# Altium PCB SHield2Gen.PcbDoc
Units mil, origin at the board's own origin, x right, y up, seen from the top; angles counter-clockwise.
Board outline 3610 x 2445 mil, 2 copper layers (Top Layer, Bottom Layer); 59 components, 131 nets, 342 pads, 22 vias.
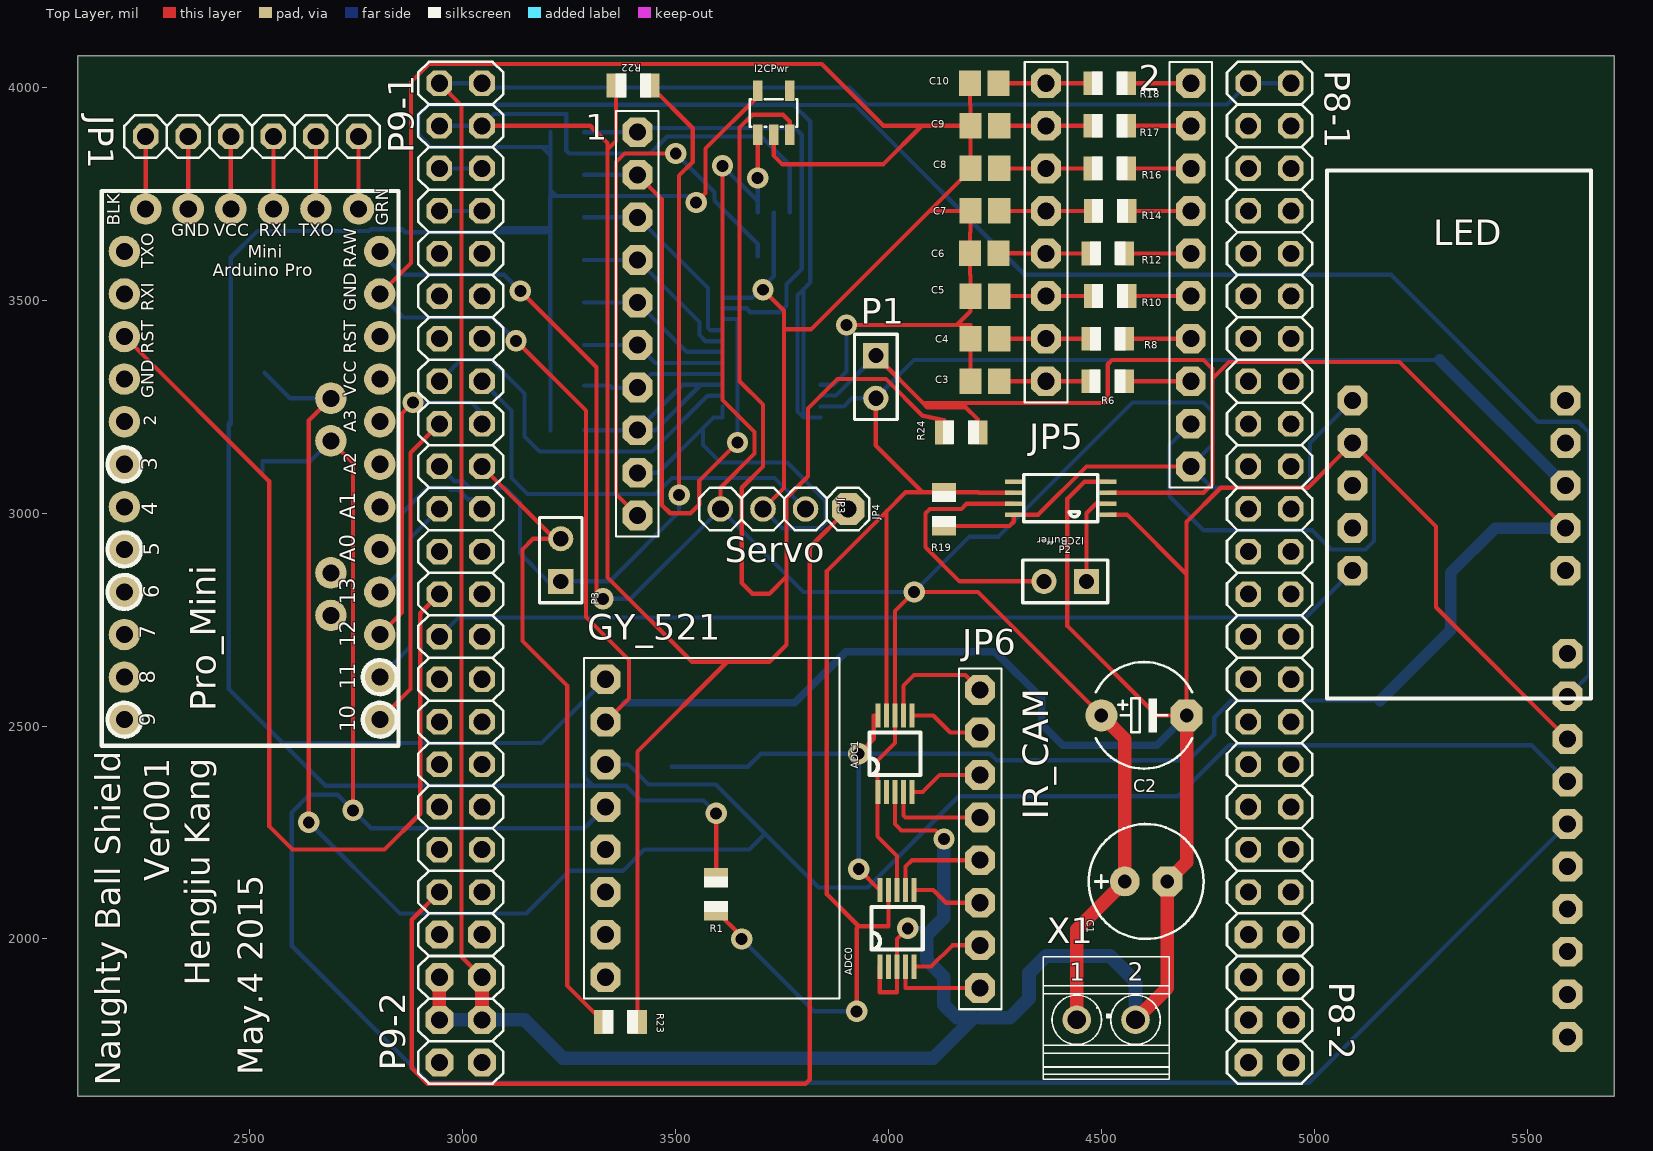
[diagram p0: Top Layer view]
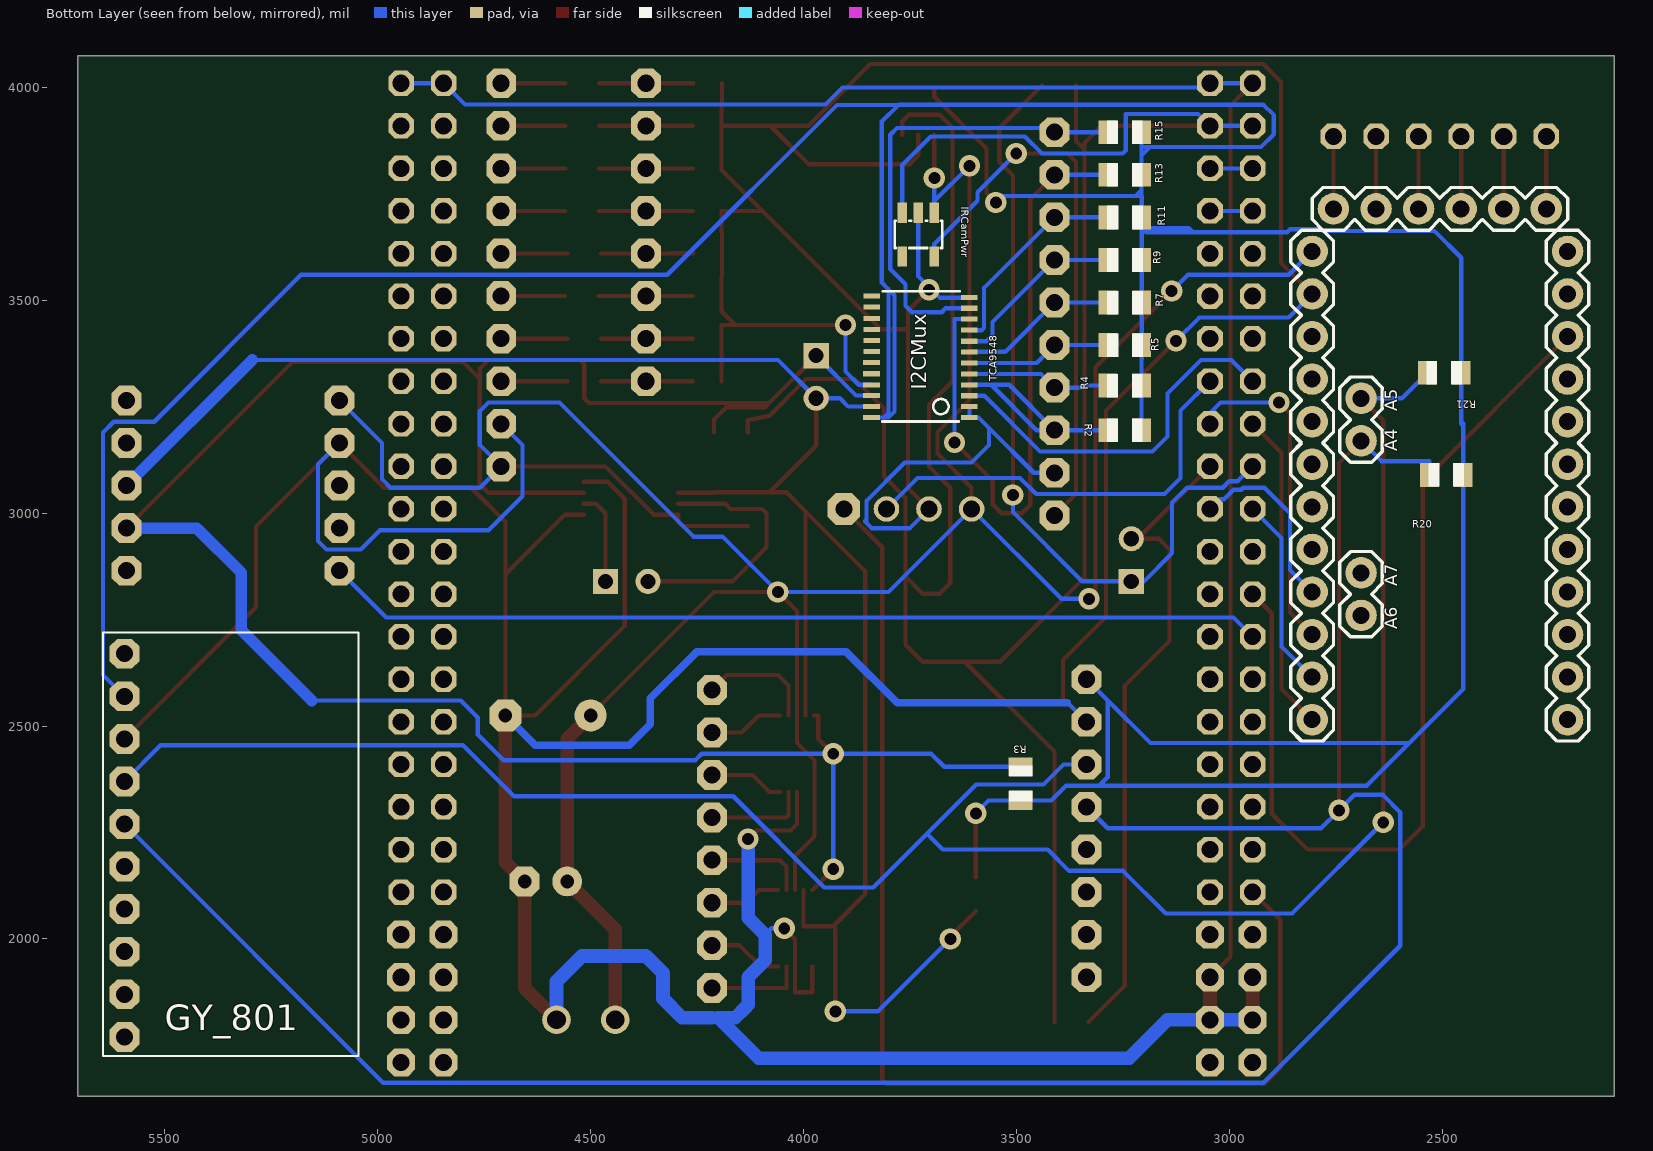
[diagram p1: Bottom Layer view, seen from below]

## Layer stack, top to bottom
Top Solder: solder mask 0.4, Solder Resist, Dk 3.5
Top Layer: signal copper 1.4
Dielectric 1: dielectric 12.6, FR-4, Dk 4.8
Bottom Layer: signal copper 1.4
Bottom Solder: solder mask 0.4, Solder Resist, Dk 3.5

## Board outline
2095,1630 5705,1630 5705,4075 2095,4075

## Design rules (kind name [scope] priority, off if disabled: settings)
Clearance [All] p1: gap=10
PolygonConnect [All] p1: connectstyle=Relief reliefconductorwidth=10 reliefentries=4 polygonreliefangle="90 Angle" airgapwidth=10
RoutingVias [All] p1: holewidth=28 width=50 viastyle="Through Hole" minholewidth=28 minwidth=50 maxholewidth=28 maxwidth=50
SolderMaskExpansion [All] p1: expansion=4
UnpouredPolygon [All] p1: allowunpoured=FALSE
Width [All] p1: maxlimit=32 minlimit=10 preferedwidth=10 minimp=50.000000 maximp=50.000000 favimp=50.000000
29 further rules are at their usual default settings.

## Classes and differential pairs
component class IRReceiver: 2 ADC0 ADC1 C3 C4 C5 C6 C7 C8 C9 C10 JP5 JP6 R6 R8 R10 R12 R14 R16 R17 R18
component class I2Cmux: 1 I2CMux IRCamPwr R1 R2 R3 R4 R5 R7 R9 R11 R13 R15
component class IMU_Core: GY_521 GY_801 JP1 Pro_Mini R20 R21
component class LED_Band: LED
component class main_pinout: C1 C2 I2CBuffer I2CPwr JP3 JP4 P1 P2 P3 P8-1 P8-2 P9-1 P9-2 R19 R22 R23 R24 X1

## Components (designator, comment, footprint, x,y, rotation, side; value= is the part's Value field where it differs from the comment)
1 "IR_Camera" 1X10-BIG 3410,3445 r90 top
2 "App_Sensor" 1X10-BIG 4710,3560 r90 top
ADC0 "ADS1115" 10-VSSOP 4080,1935 r90 top
ADC1 "ADS1115" 10-VSSOP 4075,2345 r90 top
C1 "47uF" E2,5-7 4605,2135 r0 top
C2 "0.47uF" E5-6 4600,2525 r0 top
C3 "100u" C0805 4226.54,3310 r180 top
C4 "100u" C0805 4226.54,3410 r180 top
C5 "100u" C0805 4226.54,3510 r180 top
C6 "100u" C0805 4225,3610.71 r180 top
C7 "100u" C0805 4226.54,3710 r180 top
C8 "100u" C0805 4226.54,3810 r180 top
C9 "100u" C0805 4226.54,3910 r180 top
C10 "100u" C0805 4225,4010 r180 top
GY_521 "GY_521" sensor_8pin 3335,1860 r0 top locked
GY_801 "GY-801" Sensor_10Pin 5595,1770 r180 bottom
I2CBuffer "LTC4301" TSSOP-8 4405,3035 r90 top
I2CMux "TCA9548" TSSOP24 3725,3340 r90 bottom
I2CPwr "LP5907" SOT23-5L 3730,3940 r0 top
IRCamPwr "LP5907" SOT23-5L 3730,3655 r0 bottom
JP1 "<b>PIN HEADER</b>" 1X06 2505,3885 r0 top
JP3 "Servo_Ctl" 1X03 3705,3010 r0 top
JP4 "Servo_FB" 1X01 3905,3010 r0 top
JP5 "<b>PIN HEADER</b>" 1X08-BIG 4370,3660 r90 top
JP6 "<b>PIN HEADER</b>" 1X08-BIG 4215,2235 r90 top
LED "Trinket8M" trinket 5030,2565 r0 top
P1 "Header 2" HDR1X2 3970,3370 r270 top
P2 "Header 2" HDR1X2 4465,2840 r180 top
P3 "Header 2" HDR1X2 3230,2840 r90 top
P8-1 "2x20" 2X20 4895,3060 r270 top locked
P8-2 "2x4" 2X04 4895,1860 r270 top locked
P9-1 "2x20" 2X20 2995,3060 r270 top locked
P9-2 "2x4" 2X04 2995,1860 r270 top locked
Pro_Mini "Arduino_Pro_Mini" Arduino_pro_mini 2152,2454 r0 top locked
R1 "4.7K" R0805 3595,2105 r90 top
R2 "4.7K" R0805 3245,3195 r0 bottom
R3 "4.7K" R0805 3490,2365 r270 bottom
R4 "4.7K" R0805 3245,3300 r0 bottom
R5 "4.7K" R0805 3244.37,3395 r0 bottom
R6 "10k" R0805 4514.37,3310 r0 top
R7 "4.7K" R0805 3244.37,3495 r0 bottom
R8 "10k" R0805 4515,3410 r0 top
R9 "4.7K" R0805 3244.37,3595 r0 bottom
R10 "10k" R0805 4520,3510 r0 top
R11 "4.7K" R0805 3244.37,3695 r0 bottom
R12 "10k" R0805 4515,3610 r0 top
R13 "4.7K" R0805 3245,3795 r0 bottom
R14 "10k" R0805 4520,3710 r0 top
R15 "4.7K" R0805 3245,3895 r0 bottom
R16 "10k" R0805 4519.37,3810 r0 top
R17 "10k" R0805 4519.37,3910 r0 top
R18 "10k" R0805 4519.37,4010 r0 top
R19 "10K" R0805 4130,3010 r270 top
R20 "4.7K" R0805 2490,3090 r180 bottom
R21 "4.7K" R0805 2495,3330 r180 bottom
R22 "4.7K" R0805 3400,4005 r180 top
R23 "4.7K" R0805 3370,1805 r0 top
R24 "10K" R0805 4170,3190 r0 top
X1 "MKDS 1/ 2-3,5" 1751248 4511,1813.94 r0 top

## Footprints (in the part's own frame and the unit in brackets; to place one, negate y for a bottom-side part, rotate by r counter-clockwise, add the part's x,y. Pads: shape width x height; smd on the part's side, far side on the other; paste and mask are expansions set on the pad)
1X01 [mil]
  oct 76x76 hole 40: 1(0,0)
  silkscreen extent -50,-50 50,50
1X03 [mil]
  round 60 hole 40: 1(-100,0) 2(0,0) 3(100,0)
  silkscreen extent -150,-50 150,50
1X06 [mil]
  oct 60x60 hole 40: 1(-250,0) 2(-150,0) 3(-50,0) 4(50,0) 5(150,0) 6(250,0)
  silkscreen extent -300,-50 300,50
1X08-BIG [mil]
  oct 70x70 hole 40: 1(-350,0) 2(-250,0) 3(-150,0) 4(-50,0) 5(50,0) 6(150,0) 7(250,0) 8(350,0)
  silkscreen extent -400,-50 400,50
1X10-BIG [mil]
  oct 70x70 hole 40: 1(-450,0) 2(-350,0) 3(-250,0) 4(-150,0) 5(-50,0) 6(50,0) 7(150,0) 8(250,0) 9(350,0) 10(450,0)
  silkscreen extent -500,-50 500,50
2X04 [mil]
  oct 66x66 hole 40: 1(-150,-50) 2(-150,50) 3(-50,-50) 4(-50,50) 5(50,-50) 6(50,50) 7(150,-50) 8(150,50)
  silkscreen extent -200,-100 200,100
2X20 [mil]
  oct 60x60 hole 40: 1(-950,-50) 2(-950,50) 3(-850,-50) 4(-850,50) 5(-750,-50) 6(-750,50) 7(-650,-50) 8(-650,50) 9(-550,-50) 10(-550,50) 11(-450,-50) 12(-450,50) 13(-350,-50) 14(-350,50) 15(-250,-50) 16(-250,50) 17(-150,-50) 18(-150,50) 19(-50,-50) 20(-50,50) 21(50,-50) 22(50,50) 23(150,-50) 24(150,50) 25(250,-50) 26(250,50) 27(350,-50) 28(350,50) 29(450,-50) 30(450,50) 31(550,-50) 32(550,50) 33(650,-50) 34(650,50) 35(750,-50) 36(750,50) 37(850,-50) 38(850,50) 39(950,-50) 40(950,50)
  silkscreen extent -1000,-100 1000,100
10-VSSOP [mil]
  rect 57x12 smd mask+0: 1(0,100) 2(0,80) 3(0,60) 4(0,40) 5(0,20) 6(180,20) 7(180,40) 8(180,60) 9(180,80) 10(180,100)
  silkscreen extent 40,0 140,120
1751248 [mil]
  round 67 hole 44: 1(-68.9,-3.94) 2(69,-3.94)
  silkscreen extent -148,-144 148,144
Arduino_pro_mini [mil]
  round 74 hole 40: 1(53,1161) 2(53,1061) 3(53,961) 4(53,861) 5(53,761) 6(53,661) 7(53,561) 8(53,461) 9(53,361) 10(53,261) 11(53,161) 12(53,61) 13(653,61) 14(653,161) 15(653,261) 16(653,361) 17(653,461) 18(653,561) 19(653,661) 20(653,761) 21(653,861) 22(653,961) 23(653,1061) 24(653,1161) 25(603,1261) 26(503,1261) 27(403,1261) 28(303,1261) 29(203,1261) 30(103,1261) 31(538,306) 32(538,406) 33(538,716) 34(538,816)
  silkscreen extent 0,0 697,1303
C0805 [mil]
  rect 52x60 smd: 1(-33.46,0) 2(34,0)
E2,5-7 [mil]
  round 70 hole 32: +(-50,0)
  oct 70x70 hole 32: -(50,0)
  silkscreen extent -135,-135 135,135
E5-6 [mil]
  round 75 hole 32: +(-100,0)
  oct 75x75 hole 32: -(100,0)
  silkscreen extent -113,-125 113,126
HDR1X2 [mm] "Connector; Header; 2 Position"
  rect 1.5x1.5 hole 0.9: 1(0,0)
  round 1.5 hole 0.9: 2(2.54,0)
  silkscreen extent -1.27,-1.27 3.81,1.27
R0805 [mil]
  rect 44x56 smd: 1(-39.37,0) 2(40,0)
  silkscreen extent -42,-28 42,28
sensor_8pin [mil]
  oct 70x70 hole 40: 1(0,750) 2(0,650) 3(0,550) 4(0,450) 5(0,350) 6(0,250) 7(0,150) 8(0,50)
  silkscreen extent -50,0 550,800
Sensor_10Pin [mil]
  oct 70x70 hole 40: 1(0,900) 2(0,800) 3(0,700) 4(0,600) 5(0,500) 6(0,400) 7(0,300) 8(0,200) 9(0,100) 10(0,0)
  silkscreen extent -50,-45 550,950
SOT23-5L [mil]
  rect 22x48 smd: 1(-37.4,-51.18) 2(0,-51.18) 3(38,-51.18) 4(38,52) 5(-37.4,52)
  silkscreen extent -56,-32 56,32
trinket [mil]
  oct 70x70 hole 40: 1(60,700) 2(60,600) 3(60,500) 4(60,400) 5(60,300) 6(560,300) 7(560,400) 8(560,500) 9(560,600) 10(560,700)
  silkscreen extent 0,0 620,1240
TSSOP24 [mil]
  rect 12x39 smd: 1(-115.16,-114.87) 2(-89.57,-114.87) 3(-63.98,-114.87) 4(-38.39,-114.87) 5(-12.8,-114.87) 6(13,-114.87) 7(39,-114.87) 8(64,-114.87) 9(90,-114.87) 10(116,-114.87) 11(141.36,-114.87) 12(166.36,-114.87) 13(169.92,114.65) 14(144.09,114.57) 15(117.69,114.87) 16(91.51,114.87) 17(65.51,114.87) 18(39.51,114.87) 19(13.64,115) 20(-12.36,115) 21(-38.36,115) 22(-63.36,115) 23(-89.36,115) 24(-115.16,115)
  silkscreen extent -125,-92 181,90
TSSOP-8 [mil]
  rect 10x40 smd: 1(-38.39,-110.75) 2(-12.8,-110.75) 3(13,-110.75) 4(39,-110.75) 5(39,111) 6(13,111) 7(-12.8,111) 8(-38.39,111)
  silkscreen extent -55,-87 56,87

## Part data
1 2: library part PINHD-1X10
C1: library part CPOL-USE2.5-7
C2: library part CPOL-USE5-6
C3 C4 C5 C6 C7 C8 C9 C10: library part C-USC0805
JP1: library part PINHD-1X6
JP3: library part PINHD-1X3
JP4: library part PINHD-1X1
JP5 JP6: library part PINHD-1X8BIG
P1 P2 P3: "Header, 2-Pin"
P8-1 P9-1: library part PINHD-2X20
P8-2 P9-2: library part PINHD-2X4
R1 R2 R3 R4 R5 R6 R7 R8 R9 R10 R11 R12 R13 R14 R15 R16 R17 R18 R19 R20 R21 R22 R23 R24: library part R-US_R0805
X1: library part 1751248

## Via types
v1: diameter 50, hole 28, Top Layer to Bottom Layer, 22 vias

## Nets (pads, with @x,y where several pads share a name; then routed paths per layer and width w, separated by ;. In a path a pad name is that pad's centre, name@x,y a point inside that pad or via, vN(x,y) a via of type N, cw(c..) or ccw(c..) an arc to the next point about the centre after c; other vN are vias at no path point)
ADC0_0: C3.1 JP5.1 R6.1 | length 215
  Top Layer w10: C3.1 JP5.1 R6.1
ADC0_1: C4.1 JP5.2 R8.1 | length 215.6
  Top Layer w10: C4.1 JP5.2 R8.1
ADC0_2: C5.1 JP5.3 R10.1 | length 220.6
  Top Layer w10: C5.1 JP5.3 R10.1
ADC0_3: C6.1 JP5.4 R12.1 | length 217.5
  Top Layer w10: C6.1 4313,3610.71 4313.71,3610 JP5.4 R12.1
ADC1_0: C7.1 JP5.5 R14.1 | length 220.6
  Top Layer w10: C7.1 JP5.5 R14.1
ADC1_1: C8.1 JP5.6 R16.1 | length 220
  Top Layer w10: C8.1 JP5.6 R16.1
ADC1_2: C9.1 JP5.7 R17.1 | length 220
  Top Layer w10: C9.1 JP5.7 R17.1
ADC1_3: C10.1 JP5.8 R18.1 | length 221.5
  Top Layer w10: C10.1 JP5.8 R18.1
AIN0: JP4.1 P9-1.39 | length 2771.7
  Top Layer w10: P9-1.39 2880,2045 2880,1697 2917,1660 3805,1660 3815,1670 3815,2920 JP4.1
AIN1: P9-1.40
AIN2: P9-1.37
AIN3: P9-1.38
AIN4: P9-1.33
AIN5: P9-1.36
AIN6: P9-1.35
APP0: 2.3 R6.2 | length 155.6
  Top Layer w10: R6.2 2.3
APP1: 2.4 R8.2 | length 155
  Top Layer w10: R8.2 2.4
APP2: 2.5 R10.2 | length 150
  Top Layer w10: R10.2 2.5
APP3: 2.6 R12.2 | length 155
  Top Layer w10: R12.2 2.6
APP4: 2.7 R14.2 | length 150
  Top Layer w10: R14.2 2.7
APP5: 2.8 R16.2 | length 150.6
  Top Layer w10: R16.2 2.8
APP6: 2.9 R17.2 | length 150.6
  Top Layer w10: R17.2 2.9
APP7: 2.10 R18.2 | length 150.6
  Top Layer w10: R18.2 2.10
CAM_3V3: 1.1 IRCamPwr.5 | length 1320.8
  Top Layer w10: 1.1 3360,3045 3360,3825 3380,3845 v1(3500,3845)
  Bottom Layer w10: v1(3500,3845) 3591.06,3753.94 3591.06,3733.94 3692.6,3632.4 IRCamPwr.5
DGND: 1.2 2.2 ADC0.1 ADC0.3 ADC1.3 C1.- C2.- C3.2 C4.2 C5.2 C6.2 C7.2 C8.2 C9.2 C10.2 GY_521.2 GY_801.3 I2CBuffer.1 I2CBuffer.4 I2CMux.1 I2CMux.2 I2CMux.12 I2CMux.21 I2CPwr.2 IRCamPwr.2 JP3.2 LED.2 P8-1.1 P8-1.2 P9-1.1 P9-1.2 P9-2.3 P9-2.4 P9-2.5 P9-2.6 Pro_Mini.23 X1.2 | length 20819.5
  Top Layer w10: Pro_Mini.23 2878,3588 2878,4013 2920,4055 3843,4055 3988,3910 4078,3910 ; P9-1.1 2997,3958 2997,1958 P9-2.4 ; v1(3125,3405) 3289,3241 3289,2756 3390,2655 3390,2565 GY_521.2 ; v1@3695,3521.36 3695,3535 3754.5,3475.5 3754.5,3431.86 ; JP3.2 3754.5,3059.5 3754.5,3431.86 ; I2CPwr.2 3730,3840 3750,3820 3988,3820 4078,3910 ; v1(3901,3442) 4160,3442 ; ADC0.1 3979,1935 3979,1875 4020,1875 ADC0.3 4020,2000 v1(4045,2025) ; ADC1.3 4015,2270 4030,2255 4110,2255 v1(4130,2235) ; C10.2 4191,3960.54 4192.54,3959 C9.2 ; C3.2 C4.2 4192.54,3442 4160,3442 ; I2CBuffer.1 4560,2996.61 4700,2856.61 ; I2CBuffer.4 4460,3074 4420,3034 4420,2735 4630,2525 C2.- 4700,2856.61 ; GY_801.3 5286,2779 5286,2969 LED.2 4985,3060 4780.29,3060 4700,2979.71 4700,2856.61 ; 3754.5,3431.86 3817.86,3431.86 4096,3710 ; 4078,3910 C9.2 ; 4096,3710 4192.54,3806.54 C8.2 C9.2 ; 4096,3710 C7.2 4192.54,3660.54 4191,3659 C6.2 4191,3560.54 4192.54,3559 C5.2 4192.54,3474.54 4160,3442
  Top Layer w32: P9-2.5 P9-2.3 ; P9-2.6 P9-2.4 ; X1.2 4655,1885 C1.- 4700,2180 C2.-
  Bottom Layer w10: Pro_Mini.23 2860,3460 3070,3460 v1(3125,3405) ; P9-1.1 P9-1.2 3055,4000 3908.28,4000 3948.28,3960 4795,3960 P8-1.1 P8-1.2 ; GY_521.2 3380,2555 ; 1.2 3459,3095 3564,3200 ; I2CMux.2 I2CMux.1 3588.84,3224.84 3564,3200 ; I2CMux.12 3680,3506.36 v1@3701.82,3528.18 ; JP3.2 3750,2965 3840,2965 3852,2977 ; v1(3705,3525) 3705,3531.36 3730,3556.36 IRCamPwr.2 ; I2CMux.21 3870,3301.64 3901,3332.64 v1(3901,3442) ; v1(4045,2025) 4075,2025 4090,2010 ; 4130,1845 4135,1840 ; 4200,1815 4215,1815 ; 2.2 4660,3160 4660,3040 4740,2960 4995,2960 5040,2915 5120,2915 5140,2935 5140,3115 LED.2 ; 3564,3200 3564,3160 3605,3119 3762,3119 3852,3029 3852,2984.79 ; 3852,2977 3852,2984.79 ; 3852,2977 3855,2980 3855,2981.79 3852,2984.79
  Bottom Layer w18: 3380,2555 3780,2555 3900,2675 4250,2675 4360,2565 4360,2504 4409,2455 4630,2455 C2.-
  Bottom Layer w32: P9-2.5 P9-2.6 3145,1810 3235,1720 4105,1720 4200,1815 4160,1815 4135,1840 ; 4130,1845 4130,1910 4090,1950 4090,2010 4130,2050 v1(4130,2235) ; 4215,1815 4285,1815 4330,1860 4330,1920 4370,1960 4520,1960 4580,1900 X1.2
EXT.5V: 2.1 ADC0.8 ADC1.1 ADC1.8 C1.+ C2.+ I2CBuffer.8 I2CPwr.1 IRCamPwr.1 JP3.1 LED.1 Pro_Mini.24 R19.2 X1.1 | length 7569.9
  Top Layer w10: v1(3135,3522) 3314,3343 3314,2814 v1(3329,2799) ; JP3.1 3605,3060 3685,3140 3685,3191 3610,3266 v1(3610,3816) ; v1(3692.6,3787.4) I2CPwr.1 ; ADC0.8 4020,2195 3974,2241 3974,2419 4015,2460 ADC1.8 4015,2770 v1(4060,2815) 4210,2815 C2.+ ; R19.2 4284,2970 4294,2980 I2CBuffer.8 4351.61,2996.61 4465,3110 2.1
  Top Layer w32: X1.1 4442.1,2022.1 C1.+ 4555,2470 C2.+
  Bottom Layer w10: Pro_Mini.24 2860,3560 3097,3560 v1(3135,3522) ; v1(3329,2799) 3394,2799 JP3.1 3800,2815 v1(4060,2815) 4190,2945 4258,2945 4573,3260 4740,3260 4760,3240 4760,3160 2.1 4760,3060 4970,3060 4990,3080 4990,3165 LED.1 ; v1(3610,3816) 3692.6,3733.4 ; IRCamPwr.1 3692.6,3733.4 ; v1@3695,3785 v1(3692.6,3787.4) 3692.6,3733.4
GNDA_ADC: P9-1.34
GPIO_2: P9-1.22 Pro_Mini.16 | length 440.1
  Bottom Layer w10: Pro_Mini.16 2857,2867 2857,3000 2917,3060 2966.72,3060 2971.72,3055 2990,3055 3012,3033 3022,3033 P9-1.22
GPIO_3: P9-1.21 Pro_Mini.14 | length 453
  Bottom Layer w10: Pro_Mini.14 2877,2687 2877,2942 P9-1.21
GPIO_4: P9-1.17 Pro_Mini.13 | length 753
  Top Layer w10: Pro_Mini.13 2877,2587 2877,3142 P9-1.17
GPIO_5: P9-1.18 Pro_Mini.15 | length 774.7
  Top Layer w10: Pro_Mini.15 2857,2767 2857,3234 v1(2883,3260)
  Bottom Layer w10: v1(2883,3260) 3020,3260 3045,3235 P9-1.18
GPIO_7: P9-2.2
GPIO_8: P8-1.35
GPIO_9: P8-1.33
GPIO_10: P8-1.31
GPIO_11: P8-1.32
GPIO_14: P9-1.26
GPIO_15: P9-1.24
GPIO_20: P9-2.1
GPIO_22: P8-1.19
GPIO_23: P8-1.13
GPIO_26: P8-1.14
GPIO_27: P8-1.17
GPIO_30: P9-1.11
GPIO_31: P9-1.13
GPIO_32: P8-1.25
GPIO_33: P8-1.24
GPIO_34: P8-1.5
GPIO_35: P8-1.6
GPIO_36: P8-1.23
GPIO_37: P8-1.22
GPIO_38: P8-1.3
GPIO_39: P8-1.4
GPIO_40: P9-1.14
GPIO_44: P8-1.12
GPIO_45: P8-1.11
GPIO_46: P8-1.16
GPIO_47: P8-1.15
GPIO_48: I2CMux.3 P9-1.15 | length 888.3
  Bottom Layer w10: P9-1.15 2995,3360 3066,3360 3145,3281 3145,3180 3180,3145 3443.98,3145 3575,3276.02 I2CMux.3
GPIO_49: P9-1.23
GPIO_51: JP3.3 P9-1.16 | length 1008.3
  Bottom Layer w10: P9-1.16 3114,3241 3114,3083 3152,3045 3453,3045 3491,3083 3732,3083 JP3.3
GPIO_60: P9-1.12
GPIO_61: P8-1.26
GPIO_62: P8-1.21
GPIO_63: P8-1.20
GPIO_65: P8-1.18
GPIO_66: P8-1.7
GPIO_67: P8-1.8
GPIO_68: P8-1.10
GPIO_69: P8-1.9
GPIO_71: P8-2.6
GPIO_73: P8-2.4
GPIO_75: P8-2.2
GPIO_76: P8-1.39
GPIO_77: P8-1.40
GPIO_78: P8-1.37
GPIO_79: P8-1.38
GPIO_80: P8-1.36
GPIO_81: P8-1.34
GPIO_86: P8-1.27
GPIO_87: P8-1.29
GPIO_88: P8-1.28
GPIO_89: P8-1.30
GPIO_117: P9-1.25 Pro_Mini.3 | length 2238
  Top Layer w10: Pro_Mini.3 2545,3075 2545,2265 2600,2210 2816,2210 2900,2294 2900,2765 P9-1.25
GPIO_120: P9-1.31
GPIO_121: P9-1.29
GPIO_122: P9-1.30
GPIO_123: P9-1.28
GPIO_125: LED.5 P9-1.27 | length 2209.2
  Bottom Layer w10: P9-1.27 2990,2755 4980,2755 LED.5
I2C2_SCL: P3.1 P9-1.19 R22.1 | length 1869
  Top Layer w10: R22.1 3540,3904.37 3540,3825 3508,3793 v1(3508,3043)
  Bottom Layer w10: P9-1.19 2980,3075 3000,3075 3015,3060 3099,3060 3134,3025 3134,2906 3200,2840 3345,2840 3508,3003 v1(3508,3043)
I2C2_SDA: P3.2 P9-1.20 R23.1 | length 1529.7
  Top Layer w10: P9-1.20 P3.2@3215,2940 ; P3.2 3165,2940 3140,2915 3140,2700 3245,2595 3245,1890.63 R23.1
NC: LED.10
NEOPIN: LED.4
Net1_3: 1.3 I2CMux.4 R2.2 | length 562.4
  Bottom Layer w10: R2.2 1.3 ; I2CMux.4 3559,3301.61 ; 1.3 3516.61,3301.61 3559,3301.61 ; 1.3 3452.39,3195 3559,3301.61
Net1_4: 1.4 I2CMux.5 R4.2 | length 340.5
  Bottom Layer w10: R4.2 3345,3300 3350,3295 1.4 3442.2,3327.2 I2CMux.5
Net1_5: 1.5 I2CMux.6 R5.2 | length 343.2
  Bottom Layer w10: R5.2 1.5 3452,3353 I2CMux.6
Net1_6: 1.6 I2CMux.7 R7.2 | length 373.8
  Bottom Layer w10: R7.2 1.6 3526,3379 I2CMux.7
Net1_7: 1.7 I2CMux.8 R9.2 | length 423
  Bottom Layer w10: R9.2 1.7 3555.63,3449.37 3555.63,3418.37 3570,3404 I2CMux.8
Net1_8: 1.8 I2CMux.9 R11.2 | length 490.6
  Bottom Layer w10: R11.2 1.8 3575.63,3529.37 3575.63,3435.37 3581,3430 I2CMux.9
Net1_9: 1.9 I2CMux.10 R13.2 | length 1536.3
  Top Layer w10: 1.9 3467,3738 3467,3020 3487,3000 3535,3000 3555,3020 3555,3076 v1(3645,3166)
  Bottom Layer w10: R13.2 1.9 ; I2CMux.10 3645,3456 v1(3645,3166)
Net1_10: 1.10 I2CMux.11 R15.2 | length 1104.2
  Bottom Layer w10: R15.2 1.10 3440,3895 3440,3905 3780.16,3905 3796,3889.16 3796,3573.67 3760,3537.67 3760,3487.36 3744.83,3472.19 3675.17,3472.19 3666,3481.36 I2CMux.11
NetADC0_4: ADC0.4 JP6.1 | length 255
  Top Layer w10: ADC0.4 4040,1885 JP6.1
  Bottom Layer w10: JP6.1 JP6.1@4245,1885
NetADC0_5: ADC0.5 JP6.2 | length 175.7
  Top Layer w10: ADC0.5 4100,1935 4150,1985 JP6.2
NetADC0_6: ADC0.6 JP6.3 | length 167.4
  Top Layer w10: ADC0.6 4105,2115 4135,2085 JP6.3
NetADC0_7: ADC0.7 JP6.4 | length 236.2
  Top Layer w10: ADC0.7 4040,2170 4055,2185 JP6.4
NetADC0_9: ADC0.9 ADC1.9 I2CBuffer.6 I2CMux.23 LED.8 P1.2 R1.1 R19.1 | length 4832.7
  Top Layer w10: R1.1 3655,2005.63 v1(3655,2000) ; v1(3925,1830) 3925,2025 3930,2030 ; P1.2 3970,3159.37 4080,3049.37 ; ADC1.9 3995,3004.37 ; ADC0.9 4000,2030 3930,2030 ; I2CBuffer.6 4212,3048 4210.63,3049.37 R19.1 4080,3049.37 ; 3930,2030 3855,2105 3855,2864.37 3995,3004.37 ; 3995,3004.37 4040,3049.37 4080,3049.37
  Bottom Layer w10: v1(3655,2000) 3825,1830 v1(3925,1830) ; I2CMux.23 3895,3250.64 3914.36,3270 P1.2 4060,3360 5295,3360
  Bottom Layer w27: 5295,3360 LED.8
NetADC0_10: ADC0.10 ADC1.10 I2CBuffer.3 I2CMux.22 LED.7 P1.1 R3.1 R24.2 | length 5712.4
  Top Layer w10: v1(3930,2164) 3979,2115 ADC0.10 ; v1(3930,2435) 3965,2470 3965,2525 ADC1.10 ; P1.1 4081,3259 ; R24.2 4210,3220 4181,3249 4091,3249 4081,3259 ; I2CBuffer.3 4740,3048 4760,3068 4760,3315 ; LED.7 5200,3355 4800,3355 4760,3315 ; 4081,3259 4504,3259 4515,3270 4515,3350 4525,3360 4740,3360 4760,3340 4760,3315
  Bottom Layer w10: R3.1 3669.37,2404.37 3700,2435 v1(3930,2435) ; I2CMux.22 3876.64,3276.64 P1.1 ; v1(3930,2164) v1(3930,2435) ; 5155,2560 4805,2560 4765,2520 4765,2480 4705,2420 4253.71,2420 4238.71,2435 v1(3930,2435)
  Bottom Layer w27: 5155,2560 5320,2725 5320,2860 5425,2965 LED.7
NetADC1_4: ADC1.4 JP6.5 | length 237.1
  Top Layer w10: ADC1.4 4035,2290 4040,2285 JP6.5
NetADC1_5: ADC1.5 JP6.6 | length 176.6
  Top Layer w10: ADC1.5 4080,2345 4120,2385 JP6.6
NetADC1_6: ADC1.6 JP6.7 | length 176.6
  Top Layer w10: ADC1.6 4105,2525 4145,2485 JP6.7
NetADC1_7: ADC1.7 JP6.8 | length 274.9
  Top Layer w10: ADC1.7 4035,2595 4060,2620 4180,2620 JP6.8
NetGY_521_3: GY_521.3 GY_801.4 Pro_Mini.34 R21.1 | length 4989.3
  Top Layer w10: v1(2638,2274) 2638,3218 Pro_Mini.34
  Bottom Layer w10: R21.1 2594.37,3270 Pro_Mini.34 ; v1(2638,2274) 2852,2060 2872,2060 3149,2060 3249,2160 3376,2160 3426,2210 3640,2210 3672.75,2210 3709.88,2247.12 ; GY_521.3 3389,2410 3436,2363 3594,2363 3640,2317 3709.88,2247.12 ; GY_801.4 5510,2455 4800,2455 4680,2335 4165,2335 3951,2121 3836,2121 3709.88,2247.12
NetGY_521_4: GY_521.4 GY_801.5 Pro_Mini.33 R20.1 | length 5605.3
  Top Layer w10: Pro_Mini.33 2742,3118 v1(2742,2302)
  Bottom Layer w10: R20.1 2529.37,3122.37 2642.37,3122.37 Pro_Mini.33 ; GY_521.4 3285,2260 2784,2260 v1(2742,2302) 2705,2339 2640,2339 2598,2297 2598,1984 2920,1662 4987,1662 GY_801.5
NetI2CBuffer_2: I2CBuffer.2 P2.1 | length 219.9
  Top Layer w10: P2.1 4465,3000 4487.2,3022.2 I2CBuffer.2
NetI2CBuffer_7: I2CBuffer.7 P2.2 | length 607.3
  Top Layer w10: I2CBuffer.7 4183.2,3022.2 4171,3010 4097,3010 4087,3000 4087,2920 4167,2840 P2.2
NetJP1_1: JP1.1 Pro_Mini.30 | length 170
  Top Layer w10: Pro_Mini.30 JP1.1
NetJP1_2: JP1.2 Pro_Mini.29 | length 170
  Top Layer w10: Pro_Mini.29 JP1.2
NetJP1_3: JP1.3 Pro_Mini.28 | length 170
  Top Layer w10: Pro_Mini.28 JP1.3
NetJP1_4: JP1.4 Pro_Mini.27 | length 170
  Top Layer w10: Pro_Mini.27 JP1.4
NetJP1_5: JP1.5 Pro_Mini.26 | length 170
  Top Layer w10: Pro_Mini.26 JP1.5
NetJP1_6: JP1.6 Pro_Mini.25 | length 170
  Top Layer w10: Pro_Mini.25 JP1.6
NETLABEL93: P8-2.1
NETLABEL94: P8-2.3
NETLABEL95: P8-2.5
PWR_BUT: P9-1.9
SYS_5V: P9-1.7 P9-1.8 | length 100
  Bottom Layer w10: P9-1.7 P9-1.8
SYS_RST: P9-1.10
VCC_3V3: GY_521.1 GY_801.2 I2CMux.24 I2CPwr.5 R1.2 R2.1 R3.2 R4.1 R5.1 R7.1 R9.1 R11.1 R13.1 R15.1 R20.2 R21.2 | length 11861.1
  Top Layer w10: v1(3548,3730) 3570,3752 3570,3856.4 3692.6,3979 I2CPwr.5 ; R1.2 v1(3595,2295)
  Bottom Layer w10: R2.1 R4.1 3205.63,3363 3205,3363.63 R5.1 R7.1 R9.1 R11.1@3205,3670 ; R15.1 3205.63,3865 3205.63,3860 ; GY_521.1 3285,2560 ; v1(3548,3730) 3533,3745 3220,3745 ; v1(3595,2295) 3565,2325 R3.2 3418,2325 3383,2360 3305,2360 ; I2CMux.24 3810,3224.84 ; GY_801.2 5645,2620 5645,3190 5620,3215 5525,3215 5180,3560 4320,3560 3921,3959 3777,3959 ; 2450,3205 2450,3210 2455,3215 ; 2450,3205 R20.2 2450,2587 2577,2460 ; 2450,3205 2455,3210 2455,3215 ; 2455,3215 R21.2 2455,3600 2518,3663 2780,3663 2784,3667 2857,3667 2864,3660 3085,3660 ; 2577,2460 2677,2360 3305,2360 ; 2577,2460 3185,2460 3285,2560 ; 2919,3959 3777,3959 ; 2919,3959 2920,3960 3776,3960 3777,3959 ; 2919,3959 2895,3935 2895,3890 2925,3860 3185.63,3860 ; 3085,3660 3195,3660 R11.1@3205,3670 ; 3085,3660 3095,3670 R11.1@3205,3670 ; 3185.63,3860 3205.63,3860 ; 3185.63,3860 3205.63,3840 ; R11.1@3205,3670 R11.1 3205,3744 ; 3205,3744 3205,3744.37 3205.63,3745 ; 3205,3744 3205.63,3744.63 3205.63,3745 ; 3205.63,3745 3220,3745 ; 3205.63,3745 3205.63,3759.37 ; 3205.63,3759.37 R13.1 3205.63,3840 ; 3205.63,3759.37 3220,3745 ; 3205.63,3840 3205.63,3860 ; 3285,2560 3285,2380 3305,2360 ; 3777,3959 3816,3920 3816,3541.85 3800,3525.85 ; 3800,3525.85 3786,3511.85 3786,3238.84 3800,3224.84 3810,3224.84 ; 3800,3525.85 3800,3234.84 3810,3224.84
VDD_3V3: I2CPwr.3 IRCamPwr.3 P9-1.3 P9-1.4 R22.2 R23.2 R24.1 | length 6426.2
  Top Layer w10: P9-1.4 3299.37,3910 3340,3869.37 3340,3854 ; R22.2 3360,3874 3340,3854 ; R23.2 3410,2440 3621,2651 ; I2CPwr.3 3768,3920 3752,3936 3680,3936 3650,3906 3650,3310 3705,3255 3705,3110 3655,3060 3655,2836 3680,2811 3720,2811 3760,2851 ; R24.1 4130.63,3218.37 4080,3229 3994,3315 3880,3315 3811,3246 3811,3087 3760,3036 3760,2851 ; 3340,3854 3340,2849 3538,2651 3621,2651 ; 3621,2651 3720,2651 3760,2691 3760,2851
  Bottom Layer w10: P9-1.3 P9-1.4 3073,3938 3243,3938 3243,3852 3250,3845 3440,3845 3480,3885 3701,3885 3768,3818 IRCamPwr.3
VDD_5V: P9-1.5 P9-1.6 | length 100
  Bottom Layer w10: P9-1.5 P9-1.6
VDD_ADC: P9-1.32
pads on no net: ADC0.2 ADC1.2 GY_521.5 GY_521.6 GY_521.7 GY_521.8 GY_801.1 GY_801.6 GY_801.7 GY_801.8 GY_801.9 GY_801.10 I2CBuffer.5 I2CMux.13 I2CMux.14 I2CMux.15 I2CMux.16 I2CMux.17 I2CMux.18 I2CMux.19 I2CMux.20 I2CPwr.4 IRCamPwr.4 LED.3 LED.6 LED.9 P8-2.7 P8-2.8 P9-2.7 P9-2.8 Pro_Mini.1 Pro_Mini.2 Pro_Mini.4 Pro_Mini.5 Pro_Mini.6 Pro_Mini.7 Pro_Mini.8 Pro_Mini.9 Pro_Mini.10 Pro_Mini.11 Pro_Mini.12 Pro_Mini.17 Pro_Mini.18 Pro_Mini.19 Pro_Mini.20 Pro_Mini.21 Pro_Mini.22 Pro_Mini.31 Pro_Mini.32

## Silkscreen, mask and mechanical layers (free items; w line width, h text height)
Top Overlay:
  text "Servo" at 3615,2885 h60
  text "IR_CAM" at 4375,2280 h60 r90
  text "Ver001" at 2330,2135 h100 r90
  text "Hengjiu Kang" at 2425,1890 h100 r90
  text "May.4 2015" at 2550,1680 h100 r90
  text "Naughty Ball Shield" at 2215,1655 h100 r90
Mechanical 59:
  lines w10: 5705,4075 5705,1630 2095,1630 2095,4075 5705,4075 ; 5705,4075 5705,4075

## Text inside footprints (layer, text, board x,y; h text height)
Pro_Mini: Top Overlay "2" at 2290,3205 h49.6 r90; Top Overlay "GND" at 2285,3270 h49.6 r90; Top Overlay "RST" at 2285,3375 h49.6 r90; Top Overlay "RXI" at 2285,3475 h49.6 r90; Top Overlay "TXO" at 2285,3575 h49.6 r90; Top Overlay "TXO" at 2615,3640 h49.6; Top Overlay "RXI" at 2520,3640 h49.6; Top Overlay "RAW" at 2760,3575 h49.6 r90; Top Overlay "GND" at 2760,3475 h49.6 r90; Top Overlay "RST" at 2760,3375 h49.6 r90; Top Overlay "VCC" at 2760,3275 h49.6 r90; Top Overlay "A3" at 2760,3190 h49.6 r90; Top Overlay "VCC" at 2415,3640 h49.6; Top Overlay "GND" at 2315,3640 h49.6; Top Overlay "BLK" at 2205,3675 h49.6 r90; Top Overlay "GRN" at 2835,3675 h49.6 r90; Top Overlay "Arduino Pro" at 2413,3546 h49.6; Top Overlay "Mini" at 2495,3590 h49.6; Top Overlay "9" at 2290,2500 h62 r90; Top Overlay "8" at 2290,2600 h62 r90; Top Overlay "7" at 2290,2705 h62 r90; Top Overlay "6" at 2300,2800 h62 r90; Top Overlay "5" at 2300,2900 h62 r90; Top Overlay "4" at 2295,2995 h62 r90; Top Overlay "3" at 2295,3100 h62 r90; Top Overlay "A2" at 2760,3090 h49.6 r90; Top Overlay "A1" at 2760,2985 h62 r90; Top Overlay "A0" at 2760,2885 h62 r90; Top Overlay "13" at 2760,2785 h62 r90; Top Overlay "12" at 2760,2685 h62 r90; Top Overlay "11" at 2760,2585 h62 r90; Top Overlay "10" at 2760,2485 h62 r90; Bottom Overlay "A5" at 2595,3240 h49.6 r270; Bottom Overlay "A4" at 2595,3145 h49.6 r270; Bottom Overlay "A7" at 2595,2828 h49.6 r270; Bottom Overlay "A6" at 2595,2728 h49.6 r270
X1: Top Overlay "1" at 4424.39,1901.94 h42.5; Top Overlay "2" at 4562,1901.94 h42.5